# EAGLE board arduino (EAGLE 9.6.2)

Size 147.3 x 121.96 mm. Coordinates in mm from the lower left corner, seen from the top.
Outline: 0,0 147.3,0 146.03,121.96 0,121.96 0,0
Copper layers (1*16): Top 0.035mm / dielectric 1.5mm / Bottom 0.035mm
Design rules "default": minimum track width 6mil, minimum drill 0.35mm, track to track 6mil, track to pad 6mil, pad to pad 6mil, via to via 6mil, smd to smd 6mil, copper to edge 40mil, drill to drill 6mil, minimum pad ring 10mil, minimum via ring 8mil, stop-mask expansion 4mil, vias tented up to drill 0mil, thermal gap 10mil
Net classes: 0 default: width 0.051 mm; 1 power: width 1.016 mm, clearance 0.051 mm

## Footprints (pad centres in the part's own frame; a part is rotated, then mirrored left to right if it is on the bottom)
ARDUINO_ARDUINO_MEGA = drill 1.016 pad 2.2: 0 13.97,24.13; 1 11.43,24.13; 2 8.89,24.13; 3 6.35,24.13; 3.3V -13.97,-24.13; 4 3.81,24.13; 5 1.27,24.13; 5V@0 -11.43,-24.13; 5V@1 44.45,24.13; 5V@2 46.99,24.13; 6 -1.27,24.13; 7 -3.81,24.13; 8 -7.874,24.13; 9 -10.414,24.13; 10 -12.954,24.13; 11 -15.494,24.13; 12 -18.034,24.13; 13 -20.574,24.13; 14 19.05,24.13; 15 21.59,24.13; 16 24.13,24.13; 17 26.67,24.13; 18 29.21,24.13; 19 31.75,24.13; 20 34.29,24.13; 21 36.83,24.13; A0 1.27,-24.13; A1 3.81,-24.13; A2 6.35,-24.13; A3 8.89,-24.13; A4 11.43,-24.13; A5 13.97,-24.13; A6 16.51,-24.13; A7 19.05,-24.13; A8 24.13,-24.13; A9 26.67,-24.13; A10 29.21,-24.13; A11 31.75,-24.13; A12 34.29,-24.13; A13 36.83,-24.13; A14 39.37,-24.13; A15 41.91,-24.13; AREF -25.654,24.13; GND@0 -8.89,-24.13; GND@1 -6.35,-24.13; GND@2 44.45,-19.05; GND@3 46.99,-19.05; GND@4 -23.114,24.13; RESET -16.51,-24.13; VIN -3.81,-24.13 | drill 1.016 pad 2.2 octagon: 22 44.45,21.59; 23 46.99,21.59; 24 44.45,19.05; 25 46.99,19.05; 26 44.45,16.51; 27 46.99,16.51; 28 44.45,13.97; 29 46.99,13.97; 30 44.45,11.43; 31 46.99,11.43; 32 44.45,8.89; 33 46.99,8.89; 34 44.45,6.35; 35 46.99,6.35; 36 44.45,3.81; 37 46.99,3.81; 38 44.45,1.27; 39 46.99,1.27; 40 44.45,-1.27; 41 46.99,-1.27; 42 44.45,-3.81; 43 46.99,-3.81; 44 44.45,-6.35; 45 46.99,-6.35; 46 44.45,-8.89; 47 46.99,-8.89; 48 44.45,-11.43; 49 46.99,-11.43; 50 44.45,-13.97; 51 46.99,-13.97; 52 44.45,-16.51; 53 46.99,-16.51 | hole 3.2: -34.29,24.13; -35.56,-24.13; 16.51,8.89; 16.51,-19.05; 40.64,24.13; 46.99,-24.13
C025-024X044 = drill 0.813 octagon: 1 -1.27,0; 2 1.27,0
IM920C = smd 0.3 x 1.1: $P1 -1.75,-13.45; $P2 -1.75,-9.55; $P3 -2.25,-13.45; $P4 -2.25,-9.55; $P5 -2.75,-13.45; $P6 -2.75,-9.55; $P7 -3.25,-13.45; $P8 -3.25,-9.55; $P9 -3.75,-13.45; $P10 -3.75,-9.55; $P11 -4.25,-13.45; $P12 -4.25,-9.55; $P13 -4.75,-13.45; $P14 -4.75,-9.55; $P15 -5.25,-13.45; $P16 -5.25,-9.55; $P17 -5.75,-13.45; $P18 -5.75,-9.55; $P19 -6.25,-13.45; $P20 -6.25,-9.55 | hole 2.5: 7,-12 | hole 2: -7,14
IM920_BOARD = drill 0.8 pad 0.813 square: IO1 7.24,-17.27; IO2 7.24,-16; IO3 5.97,-17.27; IO4 5.97,-16; IO5 4.7,-17.27; IO6 4.7,-16; IO7 3.43,-17.27; IO8 3.43,-16; IO9 2.16,-17.27; IO10 2.16,-16; IO11 0.89,-17.27; IO12 0.89,-16; IO13 -0.38,-17.27; IO14 -0.38,-16; IO15 -1.65,-17.27; IO16 -1.65,-16; IO17 -2.92,-17.27; IO18 -2.92,-16; IO19 -4.19,-17.27; IO20 -4.19,-16; IO21 -5.46,-17.27; IO22 -5.46,-16; IO23 -6.73,-17.27; IO24 -6.73,-16; IO25 -8,-17.27; IO26 -8,-16 | hole 2.2: -14,-16.27; 14,-16.27; 0,17.73
LED3MM = drill 0.813 octagon: A -1.27,0; K 1.27,0
MCP2515 = drill 0.8 square: CLKOUT -4.7,5.08; CS 4.7,5.08; INT 4.7,-5.08; OSC1 -4.7,-7.62; OSC2 -4.7,-5.08; RESET 4.7,7.62; RX0BF 4.7,-7.62; RX1BF 4.7,-10.16; RXCAN -4.7,7.62; SCK 4.7,-2.54; SI 4.7,0; SO 4.7,2.54; TX0RTS -4.7,2.54; TX1RTS -4.7,0; TX2RTS -4.7,-2.54; TXCAN -4.7,10.16; VDD 4.7,10.16; VSS -4.7,-10.16
2PIN_SIDE = drill 1.2 square: P$1 -1.27,0; P$2 1.27,0
0207/10 = drill 0.813 octagon: 1 -5.08,0; 2 5.08,0
DS-01 = drill 0.813 long: 1 0,-3.81; 2 0,3.81
3PIN_SIDE = drill 1.2 square: P$1 -2.54,0; P$2 0,0; P$3 2.54,0
MCP2562 = drill 0.8 square: CANH 8.255,6.35; CANL 8.255,3.81; RXD 0,1.27; STBY 8.255,8.89; TXD 0,8.89; VDD 0,3.81; VIO 8.255,1.27; VSS 0,6.35
MD13S = smd 2.54 x 4.572: 1 -1.27,24.13; 2 -1.27,19.05; 3 -1.27,13.97; 4 -1.27,8.89 | smd 6.35 x 2.032: 5 60.325,17.78; 6 60.325,20.32; 7 60.325,22.86
HUSG20 = drill 0.8 square: A 1.27,0; B 6.07,0

## Placement (x,y rotation side)
B1  ARDUINO_ARDUINO_MEGA_R3FULL  [ARDUINO_ARDUINO_MEGA]  73.66,60.96 0 top
C1  [C025-024X044]  73.66,41.91 0 top
C2  [C025-024X044]  73.66,44.45 0 top
C3  [C025-024X044]  78.74,41.91 0 top
C4  [C025-024X044]  78.74,44.45 0 top
IM1  IM920C  [IM920C]  34.29,62.23 0 top
IM2  IM920IM920_BOARD  [IM920_BOARD]  63.5,62.23 90 top
LED1  [LED3MM]  39.37,44.45 0 top
LED2  [LED3MM]  49.53,44.45 0 top
MCP2  MCP2515  [MCP2515]  104.66,54.11 0 top
POW  [2PIN_SIDE]  13.97,39.37 270 top
POW1  [2PIN_SIDE]  132.08,40.64 90 top
POW2  [2PIN_SIDE]  132.08,81.28 90 top
POW3  [2PIN_SIDE]  13.97,81.28 270 top
POW4  [2PIN_SIDE]  132.08,63.5 90 top
R1  [0207/10]  91.44,55.88 0 top
R2  [0207/10]  91.44,53.34 0 top
R3  [0207/10]  91.44,50.8 0 top
R4  [0207/10]  91.44,48.26 0 top
R5  [0207/10]  30.48,45.72 0 top
R6  [0207/10]  57.15,44.45 0 top
S1  [DS-01]  101.6,72.39 0 top
S2  [DS-01]  107.95,72.39 0 top
SV1  [3PIN_SIDE]  69.85,99.06 90 top
SV2  [3PIN_SIDE]  76.2,111.76 270 top
SV3  [3PIN_SIDE]  76.2,22.86 270 top
SV4  [3PIN_SIDE]  69.85,7.62 90 top
U$1  [MCP2562]  87.63,67.31 0 top
U$2  MD13S  [MD13S]  142.16,120.96 180 top
U$3  HUSG20  [HUSG20]  86.36,41.91 0 top
U$4  MD13S  [MD13S]  3.66,0.96 0 top
U$5  MD13S  [MD13S]  142.16,33.96 180 top
U$6  MD13S  [MD13S]  3.66,87.96 0 top

## Library data of the parts
B1 = ArduinoMega
C1-C4 = rcl; SPICEPREFIX: C
IM1 IM2 = IM920
LED1 LED2 = led
MCP2 = MCP2515
POW POW1-POW4 SV1-SV4 = XR Connector
R1-R6 = rcl; SPICEPREFIX: R
S1 S2 = switch-dil; OC_FARNELL: unknown; OC_NEWARK: unknown
U$1 = MCP2562
U$2 U$4-U$6 = Module; CYTRON-PC: MD13S; DESC: 13Amp DC Motor Driver - GROVE Compatible; MF: Cytron; MPN: MD13S
U$3 = HUSG20

## Nets
+5V [power]: B1.5V@0 C3.1 IM1.$P17 IM2.IO17 IM2.IO23 MCP2.VDD POW1.P$1 POW2.P$1 POW3.P$1 POW.P$1 R1.2 U$1.VDD
CAN_INT: MCP2.INT
DIR1: B1.40 SV1.P$2
DIR2: B1.41 SV2.P$2
DIR3: B1.42
DIR4: B1.43
DRI3: SV3.P$2
DRI4: SV4.P$2
GND: B1.GND@0 LED1.K LED2.K
IM_BUSY: B1.31 IM1.$P1
IM_BUSY2: B1.32 IM2.IO1
IM_RESET: B1.33 IM1.$P19
IM_RESET2: B1.34 IM2.IO25
IM_RX: B1.A0 IM1.$P6
IM_RX2: B1.19 IM2.IO6
IM_TX: B1.A1 IM1.$P7
IM_TX2: B1.18 IM2.IO7
MISO: B1.50 MCP2.SO
MOSI: B1.51 MCP2.SI
N$1: C1.1 MCP2.OSC2 U$3.A
N$2: C2.2 MCP2.OSC1 U$3.B
N$3: MCP2.TXCAN U$1.TXD
N$4: MCP2.RXCAN U$1.RXD
N$5: MCP2.RESET R1.1
N$6: R2.1 U$1.VIO
N$7: POW4.P$2 R3.2
N$8: S1.1 U$1.CANH
N$9: S2.1 U$1.CANL
N$10: IM2.IO19
N$11: C4.1 R2.2 R3.1 R4.1 S1.2 S2.2
N$12: POW4.P$1 R4.2
N$13: LED1.A R5.1
N$14: IM2.IO21 R6.2
N$15: LED2.A R6.1
N$16: IM1.$P15 R5.2
PWM1: B1.2 SV1.P$1
PWM2: B1.5 SV2.P$1
PWM3: B1.11 SV3.P$1
PWM4: B1.12 SV4.P$1
SCLK: B1.52 MCP2.SCK
SS: B1.53 MCP2.CS
STBY: B1.30 U$1.STBY
V-: C1.2 C2.1 C3.2 C4.2 IM1.$P18 IM2.IO18 IM2.IO24 MCP2.VSS POW1.P$2 POW2.P$2 POW3.P$2 POW.P$2 SV1.P$3 SV2.P$3 SV3.P$3 SV4.P$3 U$1.VSS

## Tracks (layer width: path | path; a pad name or v marks a point on that pad's centre or on a via)
+5V  (11 unrouted)
DIR1  (1 unrouted)
DIR2  (1 unrouted)
GND  (2 unrouted)
IM_BUSY  (1 unrouted)
IM_BUSY2  (1 unrouted)
IM_RESET  (1 unrouted)
IM_RESET2  (1 unrouted)
IM_RX  (1 unrouted)
IM_RX2  (1 unrouted)
IM_TX  (1 unrouted)
IM_TX2  (1 unrouted)
MISO  (1 unrouted)
MOSI  (1 unrouted)
N$1  (2 unrouted)
N$2  (2 unrouted)
N$3  (1 unrouted)
N$4  (1 unrouted)
N$5  (1 unrouted)
N$6  (1 unrouted)
N$7  (1 unrouted)
N$8  (1 unrouted)
N$9  (1 unrouted)
N$11  (5 unrouted)
N$12  (1 unrouted)
N$13  (1 unrouted)
N$14  (1 unrouted)
N$15  (1 unrouted)
N$16  (1 unrouted)
PWM1  (1 unrouted)
PWM2  (1 unrouted)
PWM3  (1 unrouted)
PWM4  (1 unrouted)
SCLK  (1 unrouted)
SS  (1 unrouted)
STBY  (1 unrouted)
V-  (16 unrouted)